# Altium PCB rf-switch.PcbDoc
Units mil, origin at the board's own origin, x right, y up, seen from the top; angles counter-clockwise.
Board outline 3921.96 x 3922.02 mil, 2 copper layers (Top Layer, Bottom Layer), stack 65.792 mil thick; 21 components, 20 nets, 84 pads, 512 vias.
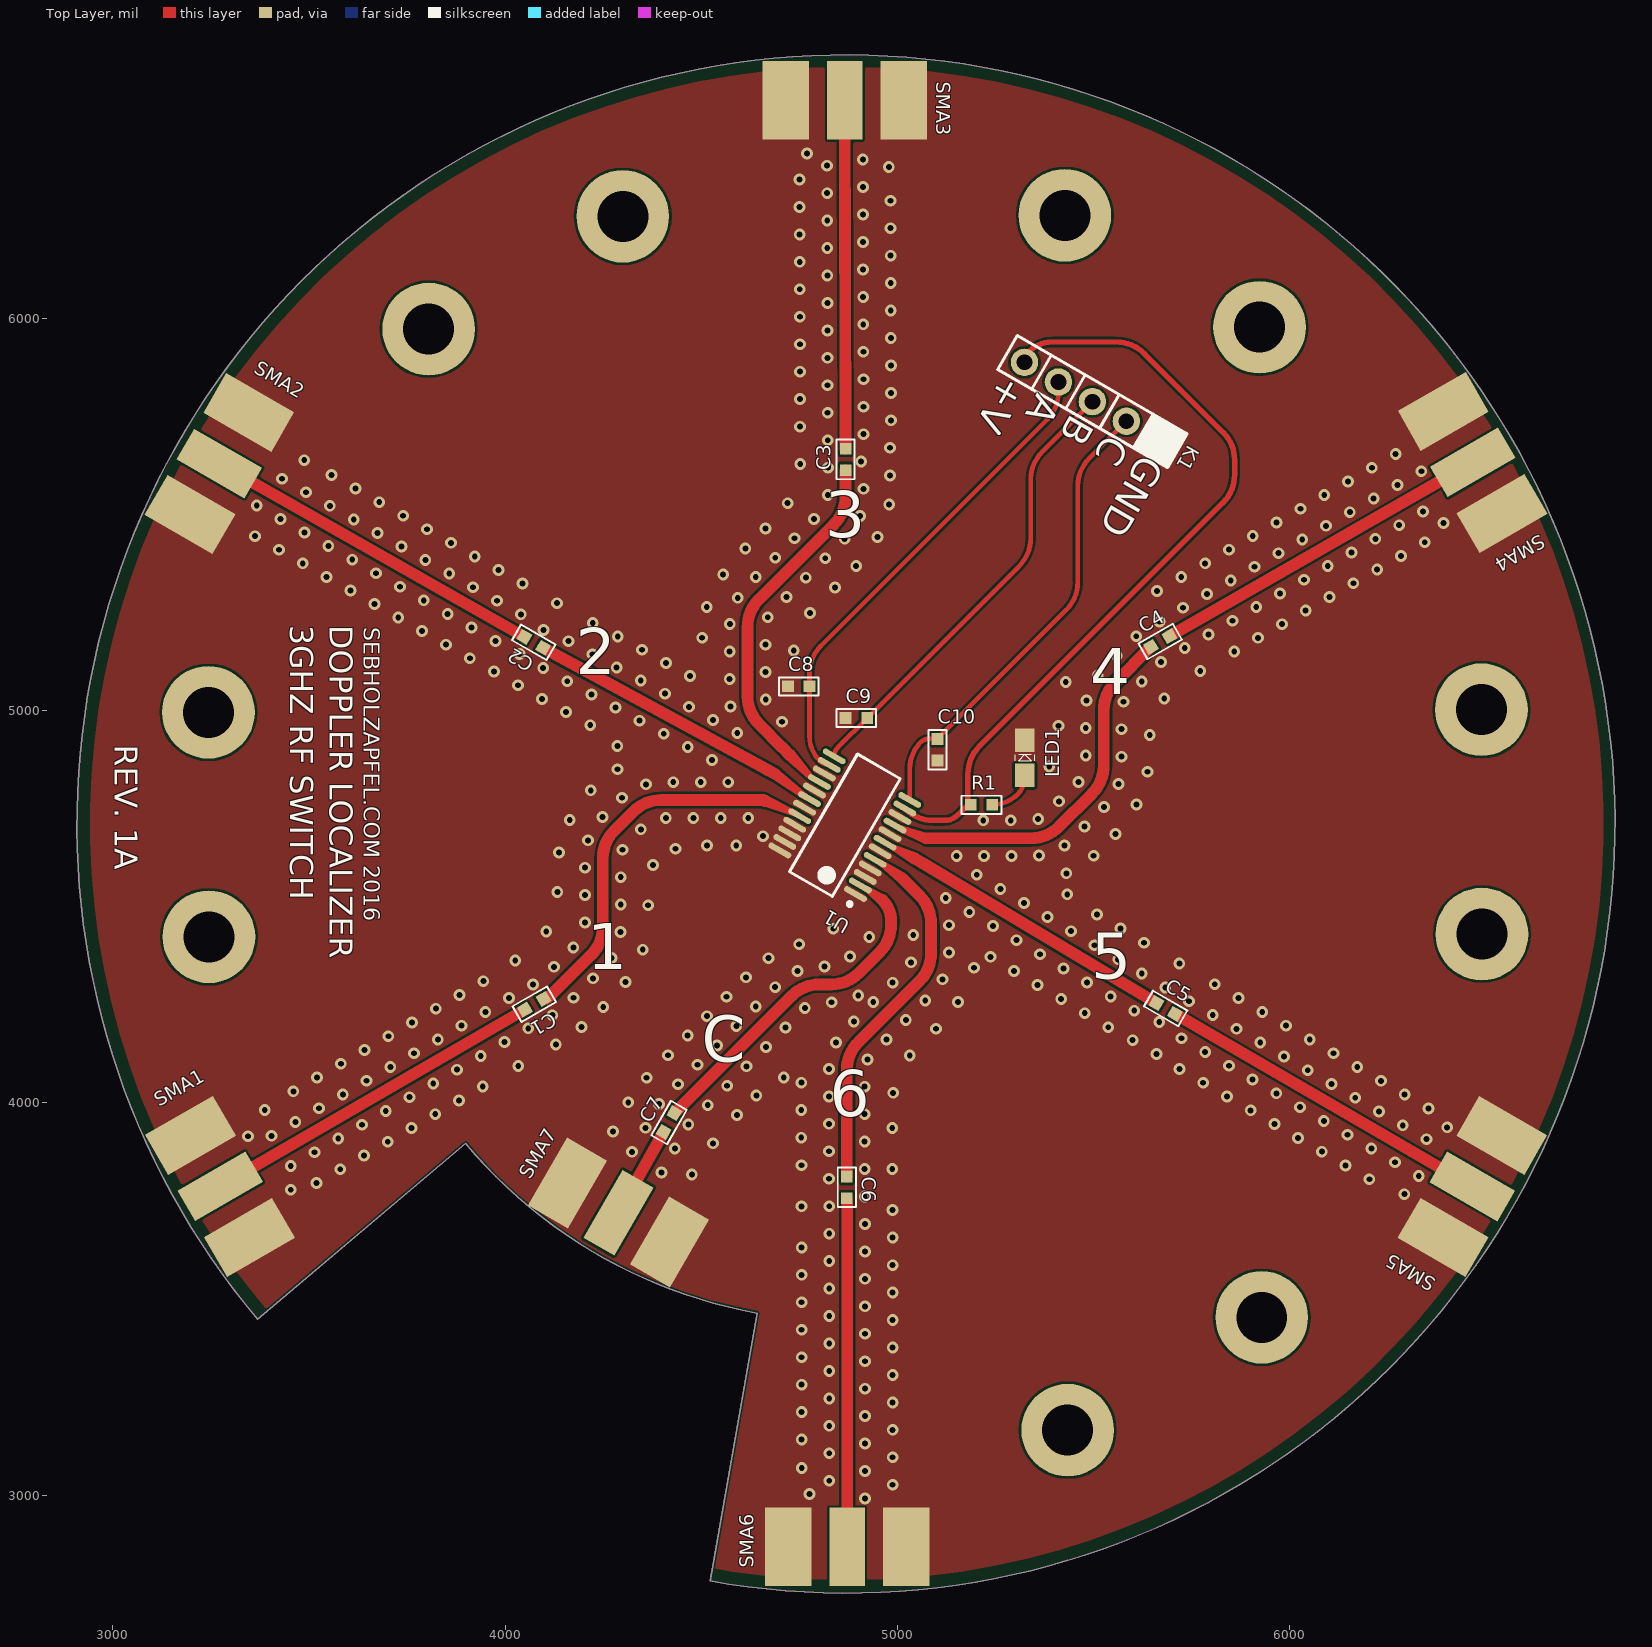
[diagram p0: Top Layer view]
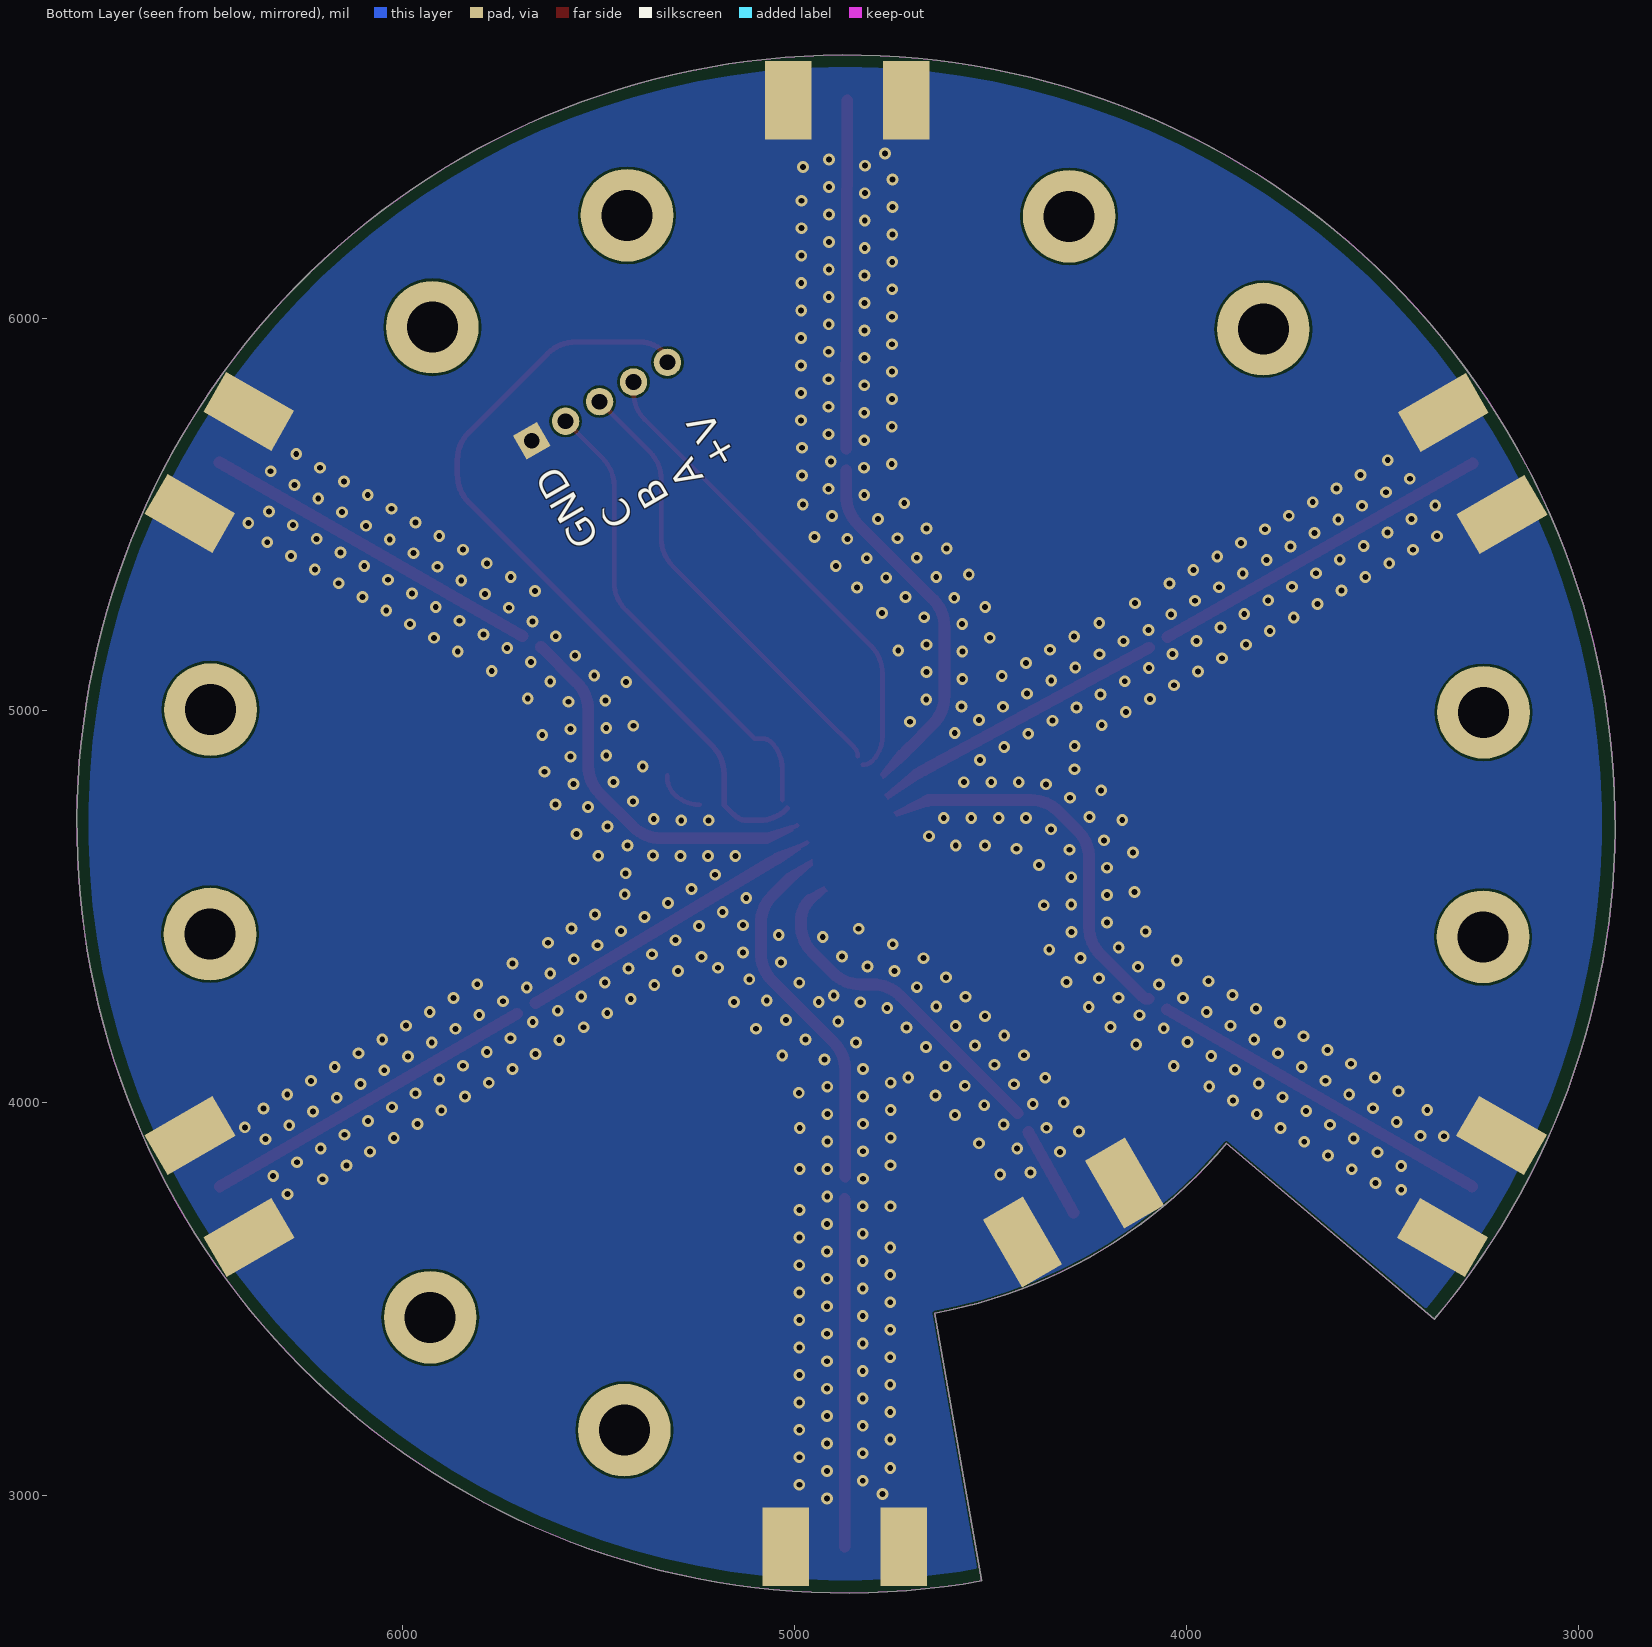
[diagram p1: Bottom Layer view, seen from below]

## Layer stack, top to bottom
Top Solder: solder mask 0.4, Solder Resist, Dk 3.5
Top Layer: signal copper 1.4
Dielectric 1: dielectric 62.9921, FR-4, Dk 4.8
Bottom Layer: signal copper 1.4
Bottom Solder: solder mask 0.4, Solder Resist, Dk 3.5

## Board outline
3368.76,3448.1 cw(c4869,4711) 4522.41,2780.84 4643.04,3463.68 cw(c4870,4710) 3898.96,3896.43

## Design rules (kind name [scope] priority, off if disabled: settings)
Clearance [All] p1: gap=6 ignorepadtopadclearanceinfootprint=FALSE except(0: Arc-Hole Track-Hole SMDPad-Hole THPad-Hole Via-Hole Fill-Hole Poly-Hole Region-Hole Text-Hole)
HoleSize [All] p1: absolutevalues=TRUE maxlimit=248.03 minlimit=39.37 maxpercent=80.000 minpercent=20.000
PlaneConnect [All] p1: planeconnectstyle=Direct reliefexpansion=20 reliefentries=4 reliefconductorwidth=10 reliefairgap=10
PolygonConnect [All] p1: connectstyle=Direct reliefconductorwidth=10 reliefentries=4 polygonreliefangle="90 Angle" airgapwidth=10
RoutingVias [All] p1: holewidth=13 width=20 viastyle="Through Hole" minholewidth=13 minwidth=20 maxholewidth=60 maxwidth=60
SolderMaskExpansion [All] p1: expansion=4
Width [All] p1: maxlimit=1000 minlimit=4 preferedwidth=10
28 further rules are at their usual default settings.

## Components (designator, comment, footprint, x,y, rotation, side; value= is the part's Value field where it differs from the comment)
C1 "10pF" 0603C-GENERIC 4098,4265.27 r210 top
C2 "10pF" 0603C-GENERIC 4096.63,5160.5 r150 top
C3 "10pF" 0603C-GENERIC 4868.15,5613 r90 top
C4 "10pF" 0603C-GENERIC 5646.37,5162.5 r30 top
C5 "10pF" 0603C-GENERIC 5660.37,4254.5 r330 top
C6 "10pF" 0603C-GENERIC 4871,3812 r270 top
C7 "10pF" 0603C-GENERIC 4404,3926 r60 top
C8 "1nF" 0603C-GENERIC 4721,5062 r0 top
C9 "1nF" 0603C-GENERIC 4868,4981 r0 top
C10 "1nF" 0603C-GENERIC 5102,4873 r90 top
K1 "HEADER-1X5" HEADER-1X5 5670.6,5688 r240 top
LED1 "Green" "0805LED - GREEN" 5325,4880 r90 top
R1 "220R" 0603R-220 5187,4760 r0 top
SMA1 "MOLEX_SMA_EDGE" MOLEX_SMA_EDGE 3358,3639.78 r30 top
SMA2 "MOLEX_SMA_EDGE" MOLEX_SMA_EDGE 3186,5482.78 r330 top
SMA3 "MOLEX_SMA_EDGE" MOLEX_SMA_EDGE 4696,6556 r270 top
SMA4 "MOLEX_SMA_EDGE" MOLEX_SMA_EDGE 6382,5780.22 r210 top
SMA5 "MOLEX_SMA_EDGE" MOLEX_SMA_EDGE 6551,3934 r150 top
SMA6 "MOLEX_SMA_EDGE" MOLEX_SMA_EDGE 5042,2868 r90 top
SMA7 "MOLEX_SMA_EDGE" MOLEX_SMA_EDGE 4436.22,3635 r60 top
U1 "HMC252A" HMC252A-QSOP24 4866,4708 r150 top

## Footprints (in the part's own frame and the unit in brackets; to place one, negate y for a bottom-side part, rotate by r counter-clockwise, add the part's x,y. Pads: shape width x height; smd on the part's side, far side on the other; paste and mask are expansions set on the pad)
0603C-GENERIC [mil] "CAPACITOR 0603"
  rect 30x30 smd: 1(0,0) 2(55,0)
  silkscreen extent -23,-23 78,23, body extent -4,-15 59,15, height 19
0603R-220 [mil] "RESISTOR 0603"
  rect 30x30 smd: 1(0,0) 2(55,0)
  silkscreen extent -23,-23 78,23, body extent -4,-15 59,15, height 20
"0805LED - GREEN" [mil]
  rect 60x50 smd: A(-45,0) K(45,0)
  silkscreen extent -8,-25 9,25, body extent -45,-25 41,25, height 24
HEADER-1X5 [mil]
  rect 70x70 hole 40: 1(0,0)
  round 70 hole 40: 2(0,-100) 3(0,-200) 4(0,-300) 5(0,-400)
  silkscreen extent -50,-450 50,50, body extent -50,-450 50,50, height 470
HMC252A-QSOP24 [mm] "SOP, 24-Leads, Body 8.65x3.90mm, Pitch 0.64mm, IPC Low Density"
  oval 1.65x0.4 smd: 1(-2.825,3.52) 2(-2.825,2.88) 3(-2.825,2.24) 4(-2.825,1.6) 5(-2.825,0.96) 6(-2.825,0.32) 7(-2.825,-0.32) 8(-2.825,-0.96) 9(-2.825,-1.6) 10(-2.825,-2.24) 11(-2.825,-2.88) 12(-2.825,-3.52) 13(2.825,-3.52) 14(2.825,-2.88) 15(2.825,-2.24) 16(2.825,-1.6) 17(2.825,-0.96) 18(2.825,-0.32) 19(2.825,0.32) 20(2.825,0.96) 21(2.825,1.6) 22(2.825,2.24) 23(2.825,2.88) 24(2.825,3.52)
  silkscreen extent -2.95,-4.4 1.6,4.4, body extent -3,-4.4 3,4.4, height 1.75
MOLEX_SMA_EDGE [mm]
  rect 5.08x2.286 smd: 1(0,4.318)
  rect 5.08x3 all layers, no hole: 2(0,8.136) 2(0,0.5)
  body extent -12.24,-0.44 2.03,9.08, height 4.32

## Part data
C1 C2 C3 C4 C5 C6 C7: library part 0603C-10PF-50V-C0G-MUR, "CAPACITOR 0603 CERAMIC", Reel=C2
C8 C9 C10: library part 0603C-1NF-50V-X7R, "CAPACITOR 0603 CERAMIC"
K1: "PINHEADER 1X5", Supplier Part Number 1=S1011E-36-ND, Reel=TH, Supplier 1=Digi-Key
LED1: library part "0805 SMD LED - GREEN", Supplier Part Number 1=160-1426-1-ND, Supplier 1=Digi-Key
R1: library part 0603R-220, "GENERIC RESISTOR 0603", Case="0603 (1608 metric)", Manufacturer="Stackpole Electronics Inc", Manufacturer Part Number="RMCF 1/16 220 1% R", Power (Watts)="0.1W, 1/10W", Resistance In Ohms=220, Supplier Part Number=RMCF1/16220FRCT-ND, Temperature Coefficient=±100ppm/°C, Tolerance=±1%, Category=Resistors, Composition="Thick Film", Lead Style="Surface Mount (SMD - SMT)", Packaging="Cut Tape (CT)", RoHS="RoHS Compliant", Supplier=Digi-Key, Supplier 1=Digi-Key, Supplier Part Number 1=RMCF1/16220FRCT-ND
SMA1 SMA2 SMA3 SMA4 SMA5 SMA6 SMA7: Supplier Part Number 1=WM5534-ND, Supplier 1=Digi-Key
U1: Supplier Part Number 1=1127-3181-ND, Supplier 1=Digi-Key

## Free pads (board coordinates)
  round 236.22 hole 129.92: MNT(3243.4,4995.58) MNT(3244.67,4423.23) MNT(3804.89,5973.09) MNT(4299.92,6260.36) MNT(5427.22,6262.86) MNT(5434.08,3165.64) MNT(5923.52,5977.79) MNT(5929.11,3452.91) MNT(6489.33,5002.77) MNT(6490.6,4430.42)

## Via types
v1: diameter 30, hole 15, Top Layer to Bottom Layer, tented both sides, 512 vias

## Nets (pads, with @x,y where several pads share a name; then routed paths per layer and width w, separated by ;. In a path a pad name is that pad's centre, name@x,y a point inside that pad or via, vN(x,y) a via of type N, cw(c..) or ccw(c..) an arc to the next point about the centre after c; other vN are vias at no path point)
+V: K1.5 R1.1 U1.11 | length 2037.7
  Top Layer w14: U1.11 5020.31,4749.29 ccw(c5091.02,4820) 5091.02,4720 5120,4720 ccw(c5120,4768.28) 5154.14,4734.14 5180,4760 5180,4838.58 cw(c5280,4838.58) 5209.29,4909.29 5830.71,5530.71 ccw(c5760,5601.42) 5860,5601.42 5860,5640 ccw(c5763.43,5640) 5831.72,5708.28 5629.29,5910.71 ccw(c5558.58,5840) 5558.58,5940 5394.45,5940 ccw(c5394.45,5856.83) 5335.64,5915.64 ccw(c5363.28,5888) K1.5
GND: C8.1 C9.1 C10.1 K1.1 LED1.K SMA1.2 SMA2.2 SMA3.2 SMA4.2 SMA5.2 SMA6.2 SMA7.2 U1.1 U1.3 U1.4 U1.6 U1.8 U1.10 U1.15 U1.17 U1.19 U1.21 U1.22 U1.23 U1.24
  other v1: 4917.61,2991.19 4775.81,3002.68 4987.95,3026.19 4826.39,3036.44 4917.61,3061.19 4756.27,3069.18 4987.95,3096.19 4826.39,3106.44 4917.61,3131.19 4756.05,3141.44 4987.95,3166.19 4826.39,3176.44 4917.61,3201.19 4756.05,3211.44 4987.95,3236.19 4826.39,3246.44 4917.61,3271.19 4756.05,3281.44 4987.95,3306.19 4826.39,3316.44 4917.61,3341.19 4756.05,3351.44 4987.95,3376.19 4826.39,3386.44 4917.61,3411.19 4756.05,3421.44 4987.95,3446.19 4826.39,3456.44 4917.61,3481.19 4756.05,3491.44 4987.95,3516.19 4826.39,3526.44 4917.61,3551.19 4756.05,3561.44 4987.95,3586.19 4826.39,3596.44 4917.61,3621.19 4756.05,3631.44 4987.93,3656.37 4826.39,3666.44 4917.61,3691.19 4987.57,3726.63 4755.83,3736.17 4826.39,3736.44 4916.89,3761.19 6292.72,3767.21 3453.18,3778.29 3518.92,3795.56 6203.44,3805.18 4825.95,3806.43 6329.56,3813.27 4475.89,3817.26 4398.48,3822.53 3579.47,3830.68 4916.61,3831.19 4987.09,3831.45 3453.36,3838.85 6142.91,3840.33 4755.34,3841.03 6269.03,3848.42 3640.03,3865.79 3513.91,3873.97 4323.37,3875.14 6082.37,3875.49 4825.39,3876.43 4432.6,3883.65 6208.5,3883.58 4530.08,3896.8 3700.58,3900.91 4916.61,3901.19 6349.03,3907.46 3574.47,3909.08 4755.06,3911.29 6021.84,3910.64 3344.54,3914.82 3404.34,3915.89 6147.97,3918.73 4274.79,3926.93 3761.14,3936.02 4357.49,3936.27 4986.95,3936.19 6401.86,3937.61 6288.5,3942.61 3635.02,3944.2 4466.99,3944.62 4825.39,3946.43 5961.31,3945.8 3464.9,3951 6087.43,3953.89 4590.98,3969.13 3821.7,3971.13 4916.61,3971.19 6227.96,3977.77 3695.58,3979.31 4755.05,3981.43 5900.78,3980.95 3386.84,3981.68 3525.46,3986.12 6354.09,3985.86 6026.9,3989.04 4516.49,3994.11 4392.52,3996.87 4313.85,4001.31 3882.25,4006.25 6167.43,4012.92 3756.13,4014.43 4825.39,4016.43 5840.25,4016.11 4640.47,4018.62 3586.01,4021.23 6293.56,4021.01 5966.37,4024.2 4989.23,4025.45 3459.89,4029.41 3942.81,4041.36 4916.61,4041.19 4565.99,4043.61 4440.86,4047.5 6106.9,4048.08 3816.69,4049.54 4755.08,4051.47 5779.71,4051.26 3646.57,4056.34 6233.02,4056.17 5905.84,4059.35 4360.81,4064.07 3520.45,4064.52 4710.17,4064.94 6046.37,4083.23 3877.25,4084.65 4825.46,4086.43 5719.18,4086.42 3707.12,4091.46 6172.49,4091.32 4615.48,4093.11 4033.27,4093.82 5845.31,4094.51 4490.36,4097 3581.01,4099.64 4924.11,4110.79 5985.84,4118.39 3937.8,4119.77 4415.3,4121.4 5031.46,4120.57 5660.5,4124.55 6111.96,4126.48 3767.68,4126.57 5784.77,4129.66 3641.56,4134.75 4664.98,4142.61 4539.86,4146.49 4129.16,4148.95 4843.73,4154.01 5925.31,4153.54 3998.36,4154.88 5599.98,4159.9 3828.23,4161.69 4972.18,4161.67 6051.43,4161.63 5724.24,4164.82 3702.12,4169.86 4465.37,4171.48 5098.55,4188.83 5864.77,4188.7 4058.91,4190 4714.48,4192.1 5537.85,4192.67 4194.54,4193.71 4589.35,4195.99 3888.79,4196.8 5990.9,4196.79 3762.67,4204.98 5667.75,4206.15 4888.94,4207.44 5021.68,4211.17 4514.87,4220.98 4120.31,4223.61 5804.24,4223.85 5477.78,4228.61 3949.35,4231.91 5930.36,4231.94 5604,4235.07 3823.23,4240.09 4764.05,4241.53 4250.15,4244.23 4638.85,4245.49 4832.44,4256.44 4938.44,4256.94 5154.76,4257.43 5743.71,4259.01 5071.17,4260.67 5417.71,4264.54 4009.9,4267.03 5869.83,4267.1 4174.47,4267.96 4564.37,4270.48 5543.93,4271 4900.29,4273.67 3883.78,4275.21 5683.11,4294.05 4688.35,4294.99 5357.64,4300.47 4070.78,4301.58 5809.24,4302.29 4987.93,4306.44 5483.85,4306.94 4306.78,4308.34 3944.34,4310.32 5115.4,4314.93 4223.97,4317.46 4613.86,4319.97 5623.04,4329.98 4745.07,4336 5297.56,4336.41 5423.78,4342.87 5195.64,4344.47 4124.25,4346.76 4814.1,4347.61 5719.03,4355.12 5035.04,4358.22 4025.61,4363.23 5562.96,4365.92 4270.97,4369.33 4671.23,4368.86 5237.49,4372.34 4879.38,4372.89 5363.71,4378.8 5131.61,4383.02 4350.78,4390.55 4173.75,4396.26 5502.89,4401.85 4749.62,4404.4 5629.11,4408.31 5303.64,4414.74 4928.28,4422.97 5040.39,4428.02 4293.75,4435.52 4104.82,4436.94 5442.82,4437.78 4836.67,4443.95 5569.04,4444.25 5243.56,4450.67 5131.61,4453.02 4203.39,4459.67 5382.75,4473.72 5508.96,4480.18 5183.49,4486.61 4364.52,4503.93 4294.61,4505.52 5322.67,4509.65 5123.42,4522.54 4203.39,4529.67 5433.11,4531.66 4133.05,4537.48 5262.6,4545.59 4294.61,4575.52 5202.53,4581.52 5430.84,4585.26 4203.39,4599.67 4376.71,4606.35 5151.16,4629.07 5221.16,4629.07 5291.16,4629.07 5361.14,4630.48 5500.59,4630.07 4136.99,4638.23 4299.21,4645.37 4434.09,4647.78 4514.71,4656.05 4589.11,4656.48 5426.13,4656.5 4210.86,4669.27 4657.3,4680.02 5556.37,4685.6 4345.97,4697.46 5477.04,4704.54 5219.1,4720.3 5289.1,4720.3 4164.7,4721.36 5359.03,4723.45 4409.71,4726.39 4479.71,4726.39 4549.71,4726.39 4619.71,4726.39 4248.06,4728.57 5526.54,4754.03 5609.94,4760.96 5412.32,4768.83 4297.69,4777.93 4218.29,4796.88 4358.75,4812.16 5563.99,4813.17 4428.54,4817.61 4498.54,4817.61 4568.54,4817.61 5461.82,4818.33 5637.93,4844.14 4286.22,4850.66 5387.31,4857.94 4527.13,4874.05 5571.61,4882.76 5480.39,4885.82 4465.66,4907.54 4285.98,4909.87 5643.39,4938.22 4404.19,4941.02 4591.61,4942.81 5571.61,4952.76 5480.39,4955.82 5411.16,4961.65 4216.86,4962.97 4705.68,4971.82 4342.72,4974.51 4530.14,4976.3 4155.39,4996.45 4281.25,5007.99 4468.66,5009.78 4574.72,5010.75 5576.27,5022.6 5482.58,5025.79 4664.35,5028.32 4093.92,5029.94 5680.39,5030.89 4219.78,5041.48 4407.19,5043.27 4032.59,5064.91 5429.47,5073.14 4158.3,5074.96 5623.05,5074.67 4345.72,5076.76 4572.39,5080.71 4471.58,5088.3 5510.96,5089.77 4663.61,5098.32 3971.18,5099.75 5772.26,5100.79 4096.83,5108.45 4284.25,5110.24 4410.1,5121.78 5672.55,5124.17 3909.92,5133.66 5559.54,5140.18 4036.73,5144.33 4222.78,5143.73 4572.39,5150.71 5858.94,5150.88 4735.8,5153.38 4348.63,5155.27 5732.86,5159.7 3849.06,5168.23 4663.61,5168.32 4161.31,5177.21 3975.1,5177.52 4502.25,5185.91 5919.67,5185.69 4287.16,5188.75 5609.04,5189.67 5793.59,5194.5 3788.2,5202.81 4097.42,5205.83 3914.24,5212.1 5980.4,5220.49 4572.79,5220.71 4223.24,5223.45 5668.12,5227.22 5854.33,5229.31 3727.33,5237.39 4669.65,5238.06 4039.86,5245.65 3853.37,5246.68 4776.98,5248.7 6041.14,5255.3 5728.62,5262.42 5915.06,5264.12 4514.06,5264.57 3666.47,5271.97 4132.33,5274.11 3978.99,5280.23 3792.51,5281.26 4593,5287.73 4717.06,5289.55 6101.87,5290.1 5789.36,5297.22 5975.79,5298.92 5661.82,5304.9 3605.6,5306.55 4841.04,5314.06 3918.13,5314.81 3731.65,5315.84 4044.17,5324.1 6162.6,5324.91 5850.09,5332.03 6036.53,5333.73 4766.56,5339.05 4638.99,5340.5 3544.74,5341.12 5723.82,5340.73 4555.81,5347.37 3857.27,5349.39 3670.78,5350.41 3983.31,5358.68 6223.34,5359.71 5910.82,5366.83 4894.88,5368.83 6097.26,5368.53 3483.88,5375.7 5784.75,5375.65 3796.4,5383.97 3609.92,5384.99 4816.06,5388.55 4688.49,5390 3922.44,5393.26 6284.07,5394.52 5971.56,5401.64 6157.99,5403.34 3423.01,5410.28 5845.48,5410.46 4612.36,5413.22 3735.54,5418.54 3549.05,5419.57 3861.58,5427.83 6344.8,5429.33 6032.29,5436.44 4865.55,5438.05 6218.73,5438.15 4737.99,5439.49 4949.12,5442.89 3362.15,5444.86 5906.22,5445.26 3674.68,5453.12 3488.19,5454.15 3800.72,5462.41 4663.5,5464.48 6093.02,5471.25 6279.46,5472.95 6392.82,5478.69 5966.95,5480.07 3613.81,5487.7 3427.33,5488.73 4787.48,5488.99 4904.56,5496.17 3739.85,5496.99 6153.76,5506.06 6340.2,5507.76 6027.68,5514.87 3552.95,5522.28 3366.46,5523.3 4979.02,5525.46 4720.32,5529.01 3678.99,5531.57 6214.49,5540.86 4822.54,5549.58 6088.42,5549.68 3492.09,5556.86 3618.13,5566.15 4913.76,5565.56 6275.22,5575.67 6149.15,5584.49 3431.22,5591.43 4981.02,5599.67 3557.26,5600.72 6335.96,5610.47 6209.88,5619.29 4823.25,5619.58 4752.27,5628.8 4907.69,5635.3 3487.54,5638.68 6270.62,5654.1 4981.15,5670.28 4822.48,5689.58 4913.67,5705.04 4752.06,5724.1 4983.93,5740.21 4822.31,5759.58 4913.5,5775.04 4751.89,5794.4 4983.76,5810.21 4822.15,5829.58 4913.33,5845.04 4751.72,5864.4 4983.59,5880.21 4821.98,5899.57 4913.16,5915.04 4751.55,5934.4 4983.42,5950.21 4821.81,5969.57 4912.99,5985.04 4751.38,6004.4 4983.25,6020.21 4821.64,6039.57 4912.83,6055.04 4751.21,6074.4 4983.08,6090.21 4821.47,6109.57 4912.66,6125.04 4751.04,6144.4 4982.91,6160.21 4821.3,6179.57 4912.49,6195.04 4750.87,6214.4 4982.74,6230.21 4821.13,6249.57 4912.32,6265.04 4750.71,6284.4 4982.57,6300.21 4820.96,6319.57 4912.15,6335.04 4750.54,6354.4 4978.31,6386.22 4820.79,6389.57 4911.98,6405.04 4769.52,6420.57
NetC1_1: C1.1 U1.20 | length 911.7
  Top Layer w30.12: C1.1 ccw(c4098,4287.64) 4113.82,4271.82 4219.71,4377.71 ccw(c4149,4448.42) 4249,4448.42 4249,4623.58 cw(c4349,4623.58) 4278.29,4694.29 4326.71,4742.71 cw(c4397.42,4672) 4397.42,4772 4657.17,4772 cw(c4657.17,4765.17) 4662,4770
NetC1_2: C1.2 SMA1.1 | length 898.6
  Top Layer w30.12: SMA1.1 C1.2
NetC2_1: C2.1 U1.18 | length 672.7
  Top Layer w30.12: C2.1 4668.6,4848.93 4687.5,4839
NetC2_2: C2.2 SMA2.1 | length 894.8
  Top Layer w30.12: SMA2.1 C2.2
NetC3_1: C3.1 U1.16 | length 863.6
  Top Layer w30.12: 4727,4885 4707,4906 4647.29,4965.71 cw(c4718,5036.42) 4618,5036.42 4618,5213.58 cw(c4718,5213.58) 4647.29,5284.29 4838.86,5475.86 ccw(c4768.15,5546.57) 4868.15,5546.57 C3.1
NetC3_2: C3.2 SMA3.1 | length 888
  Top Layer w30.12: SMA3.1 C3.2
NetC4_1: C4.1 U1.9 | length 979.2
  Top Layer w12: U1.9 5074,4674.68
  Top Layer w30.12: 5074,4674.68 5341.26,4674.68 ccw(c5341.26,4774.68) 5411.97,4703.97 5496.71,4788.71 ccw(c5426,4859.42) 5526,4859.42 5526,5000.71 cw(c5626,5000.71) 5555.29,5071.42 C4.1
NetC4_2: C4.2 SMA4.1 | length 890.9
  Top Layer w30.12: C4.2 SMA4.1
NetC5_1: C5.1 U1.7 | length 828.1
  Top Layer w12: U1.7 5067,4609.44
  Top Layer w30.12: 5046,4622 5067,4609.44 C5.1
NetC5_2: C5.2 SMA5.1 | length 876.6
  Top Layer w30.12: C5.2 SMA5.1
NetC6_1: C6.1 U1.5 | length 869.2
  Top Layer w30.12: C6.1 4871,4083.58 cw(c4971,4083.58) 4900.29,4154.29 5056.71,4310.71 ccw(c4986,4381.42) 5086,4381.42 5086,4457.58 ccw(c4986,4457.58) 5056.71,4528.29 5011,4574
NetC6_2: C6.2 SMA6.1 | length 889.3
  Top Layer w6: C6.2 cw(c4868.59,3754.59) C6.2@4872,3754.59
  Top Layer w30.12: SMA6.1 C6.2@4872,3754.59
NetC7_1: C7.1 SMA7.1 | length 235.9
  Top Layer w30.12: SMA7.1 C7.1
NetC7_2: C7.2 U1.2 | length 831.5
  Top Layer w30.12: C7.2 4730.58,4272.71 cw(c4801.29,4202) 4801.29,4302 4831.58,4302 ccw(c4831.58,4402) 4902.29,4331.29 4954.71,4383.71 ccw(c4884,4454.42) 4984,4454.42 4984,4463.89 ccw(c4908.89,4463.89) 4962,4517
NetC8_2: C8.2 K1.4 U1.14 | length 1254.4
  Top Layer w12: U1.14 cw(c4826.37,4896.05) 4802.16,4871.84 cw(c4865.31,4934.99) 4776,4934.99 C8.2 4776,5094.58 cw(c4876,5094.58) 4805.29,5165.29 5381.51,5741.51 ccw(c5310.79,5812.22) 5410.79,5812.22 K1.4
NetC9_2: C9.2 K1.3 U1.13 | length 1167.1
  Top Layer w12: U1.13 cw(c4871.19,4883.63) 4848.41,4906.41 C9.2 5310.71,5368.71 ccw(c5240,5439.42) 5340,5439.42 5340,5589.18 cw(c5440,5589.18) 5369.29,5659.89 K1.3
NetC10_2: C10.2 K1.2 U1.12 | length 1200.4
  Top Layer w12: U1.12 5031.61,4851.46 cw(c5128.54,4851.46) 5060,4920 cw(c5079.31,4900.69) 5079.31,4928 C10.2 5430.71,5256.71 ccw(c5360,5327.42) 5460,5327.42 5460,5572.58 cw(c5560,5572.58) 5489.29,5643.29 K1.2
NetLED1_A: LED1.A R1.2 | length 125
  Top Layer w12: R1.2 ccw(c5242,4851.74) 5306.87,4786.87 ccw(c5263.1,4830.64) 5325,4830.64 LED1.A

## Polygon pours and split planes (outlines as drawn)
GND on Bottom Layer "GNDBOTTOM" (solid, remove dead copper, pour order 11): 2941.87,4712 ccw(c4871,4712) 4871,2782.87 ccw(c4871,4712) 6800.13,4712 ccw(c4871,4712) 4871,6641.13 ccw(c4871,4712)
GND on Top Layer "GNDTOP" (solid, remove dead copper, pour order 13): 2941.87,4712 ccw(c4871,4712) 4871,2782.87 ccw(c4871,4712) 6800.13,4712 ccw(c4871,4712) 4871,6641.13 ccw(c4871,4712)

## Keep-outs
Keep-Out Layer:
  the board outline again, w0

## Other copper
Top Layer:
  region net NetC3_1: 4714,4878 4774,4825 4783,4838 4734,4900
  region net NetC2_1: 4681,4826 4763,4773 4771,4786 4694,4852
  region net NetC1_1: 4655,4757 4740,4729 4749,4741 4664,4786
  region net NetC4_1: 5004,4692 5071,4660 5072,4689 5005,4709
  region net NetC5_1: 4983,4646 5037,4610 5052,4636 4990,4660
  region net NetC7_2: 4916,4539 cw(c4916,4531.76) 4921.12,4536.88 4956,4502 4972,4528 4925,4552
  region net NetC6_1: 4954,4604 cw(c4954.5,4602.79) 4955,4604 5002,4563 5012.34,4573.34 ccw(c4998.69,4587) 5018,4587 4955,4622

## Silkscreen, mask and mechanical layers (free items; w line width, h text height)
Top Overlay:
  text "+V" at 5252.63,5870.51 h120 r240
  text "A" at 5337.63,5823.51 h120 r240
  text "B" at 5424.63,5771.51 h120 r240
  text "C" at 5513.63,5720.51 h120 r240
  text "GND" at 5602.63,5669.51 h120 r240
  text "3" at 4816,5404 h200
  text "DOPPLER LOCALIZER / 3GHZ RF SWITCH" at 3433,5218 h100 r270
  text "SEBHOLZAPFEL.COM 2016" at 3625,5213 h70 r270
  text "2" at 4180,5055 h200
  text "4" at 5492,5003 h200
  text "REV. 1A" at 2985,4913 h100 r270
  text "1" at 4209,4303 h200
  text "5" at 5494,4278 h200
  text "C" at 4501,4066 h200
  text "6" at 4827,3927 h200
Bottom Overlay:
  text "+V" at 5124.63,5652.51 h120 r240
  text "A" at 5209.63,5605.51 h120 r240
  text "B" at 5296.63,5553.51 h120 r240
  text "C" at 5385.63,5502.51 h120 r240
  text "GND" at 5474.63,5451.51 h120 r240
Top Solder:
  region: 4038,3708 4415,3499 4426,3931 4395,3951
  region: 4705,6709 4849,5679 4886,5679 5021,6711
  region: 4707,2740 4851,3770 4888,3770 5023,2738
  region: 3079.54,5573.22 3239.38,5840.97 4038,5218 4020,5176
  region: 6656,3847 6499,3584 5717,4194 5735,4236
  region: 6646,5567 6489,5830 5707,5220 5725,5178
  region: 3096,3855 3253,3592 4035,4202 4017,4244
Bottom Solder:
  text "REV. 1A" at 2984,4537 h100 r270
  text "DOPPLER LOCALIZER / 3GHZ RF SWITCH" at 3438,4213 h100 r270
  text "SEBHOLZAPFEL.COM 2016" at 3630,4208 h70 r270

## Dimensions
4868.41,4712.43 to 4867.5,5488.76 on Mechanical 1
4868.62,4712.28 to 4195.85,5099.65 on Mechanical 1
4868.68,4711.43 to 4196.82,4322.48 on Mechanical 1
4869.3,4711.53 to 5541.15,5100.48 on Mechanical 1
4869.35,4710.67 to 5542.12,4323.3 on Mechanical 1
4869.56,4710.52 to 4870.48,3934.2 on Mechanical 1